# EAGLE board MPGUINO (EAGLE 5.00)
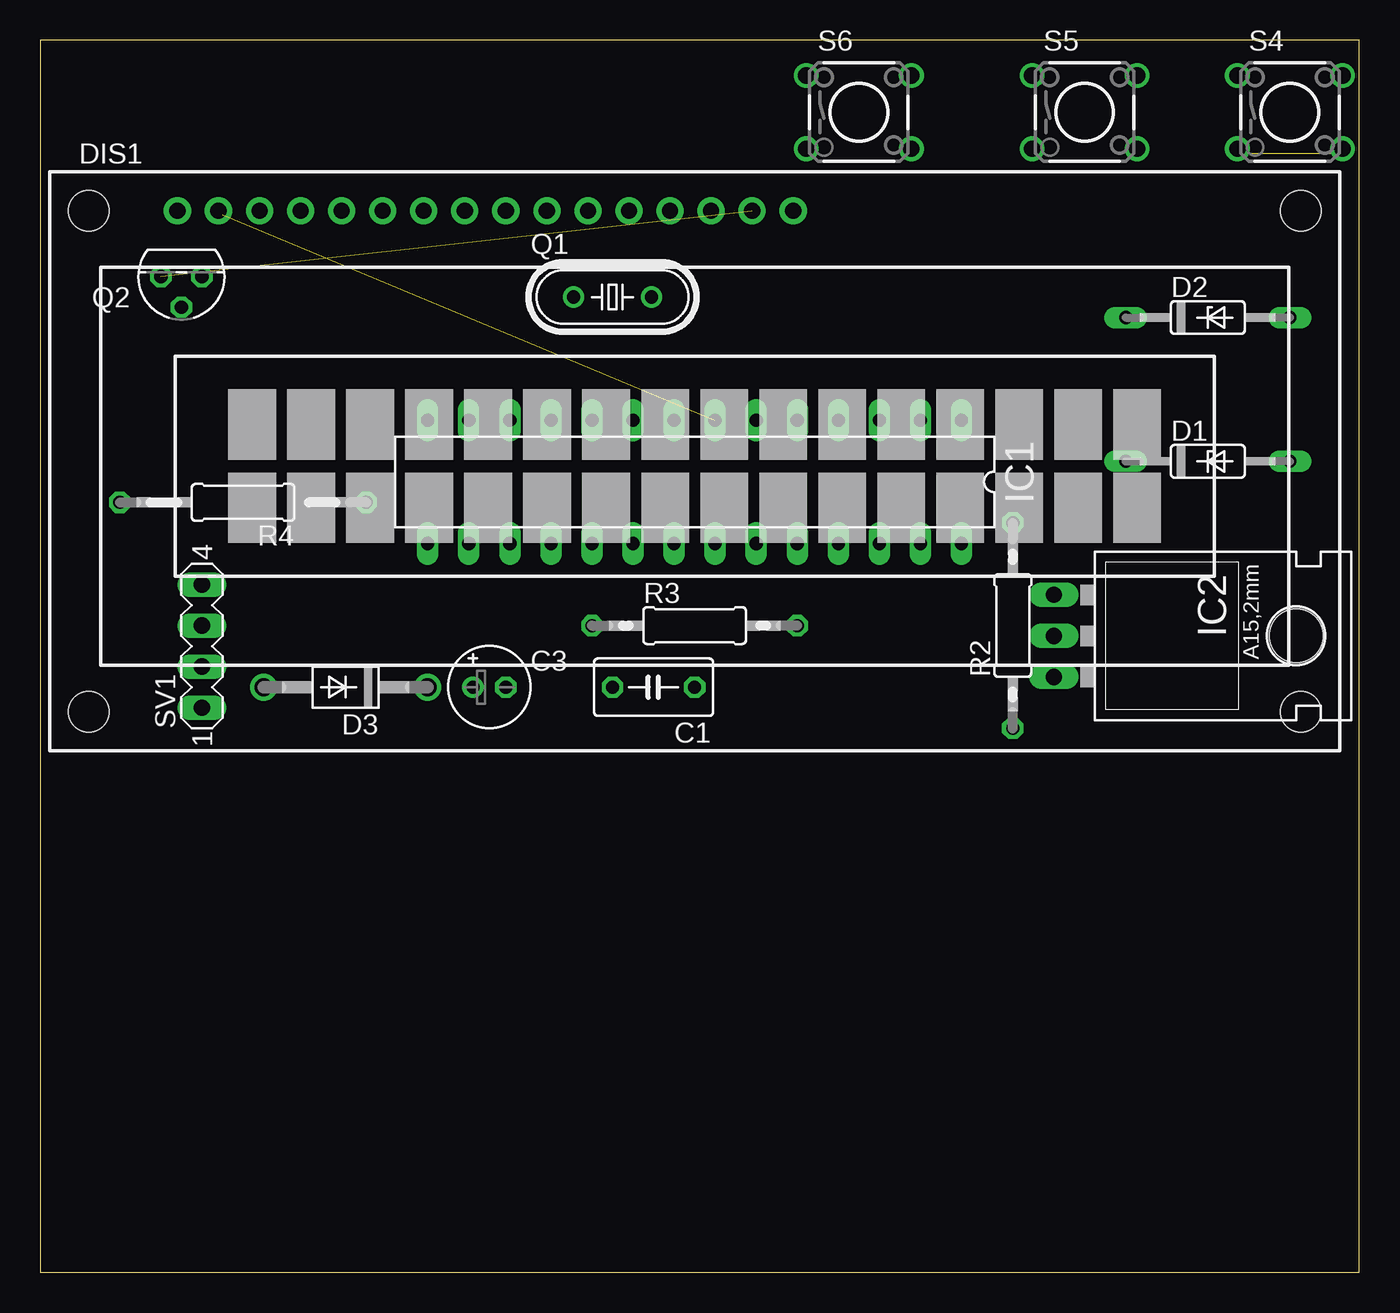
[diagram p0: board, top side]
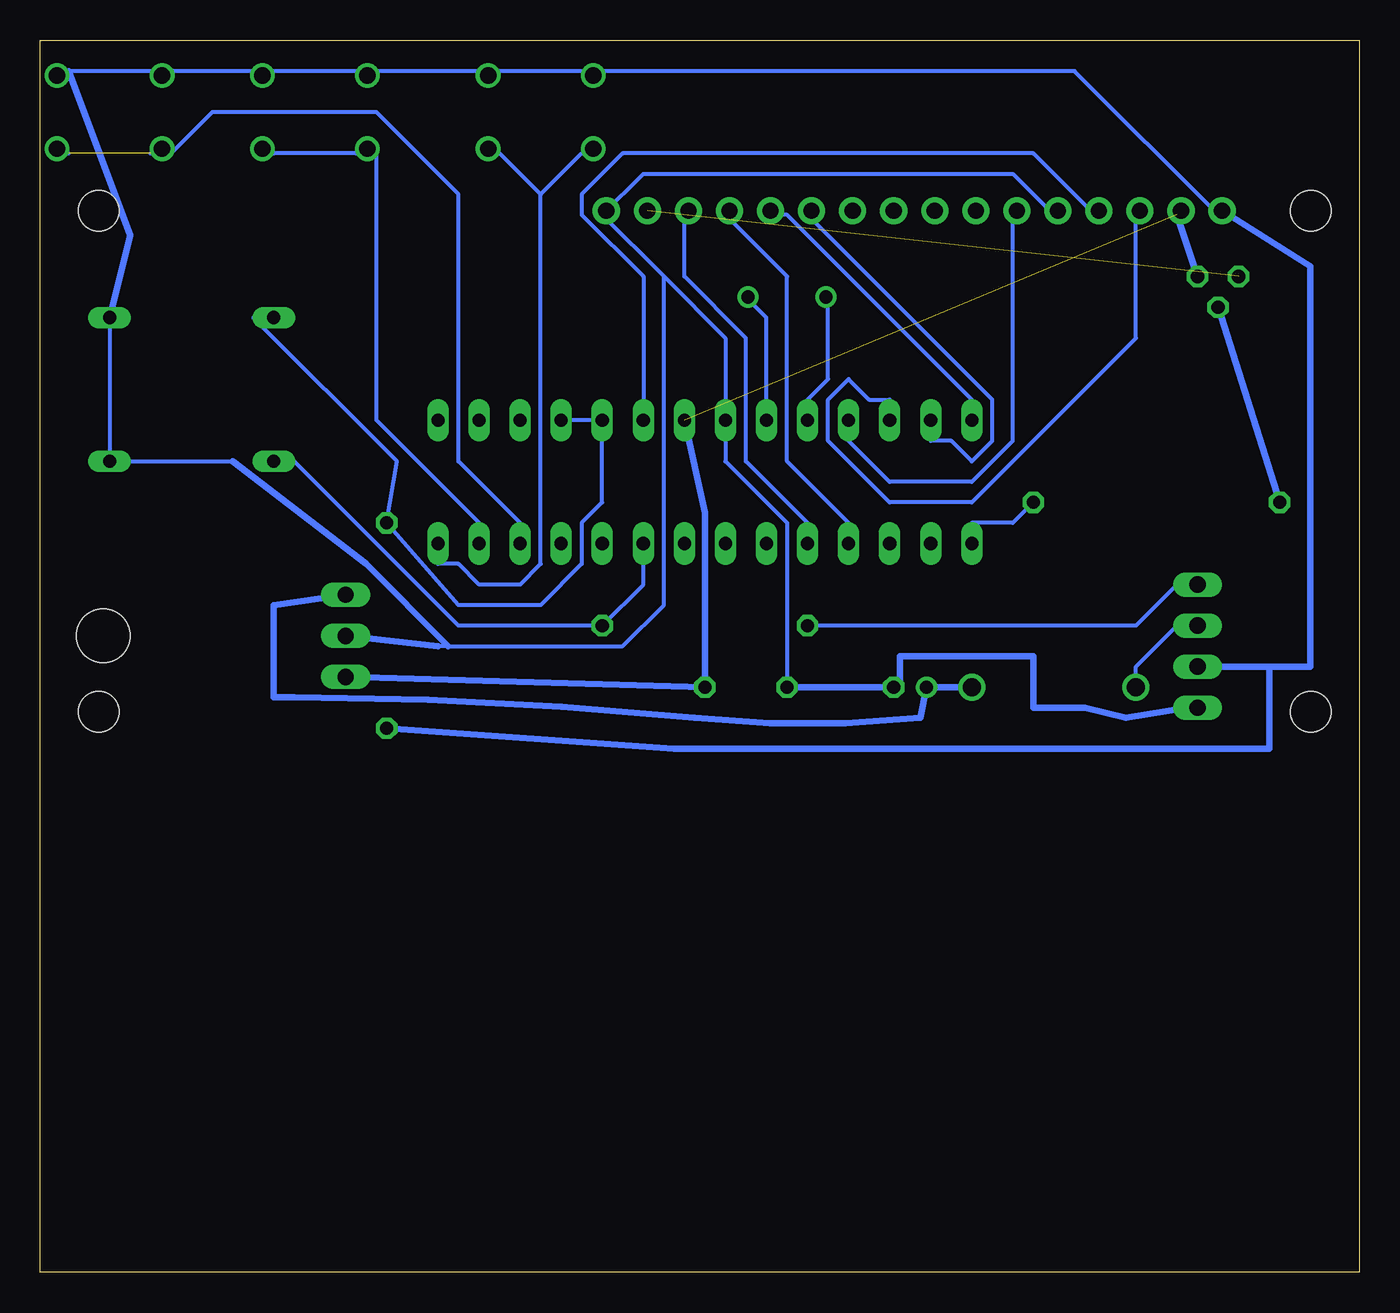
[diagram p1: board, bottom side, seen from below]

Size 81.58 x 76.19 mm. Coordinates in mm from the lower left corner, seen from the top.
Outline: 0,0 81.58,0 81.58,76.19 0,76.19 0,0
Copper layers (1*16): Top 0.035mm / dielectric 1.5mm / Bottom 0.035mm
Design rules "default": minimum track width 10mil, minimum drill 24mil, track to track 8mil, track to pad 8mil, pad to pad 8mil, via to via 8mil, smd to smd 8mil, copper to edge 40mil, drill to drill 8mil, minimum pad ring 10mil, minimum via ring 8mil, stop-mask expansion 4mil, vias tented up to drill 0mil, thermal gap 10mil

## Footprints (pad centres in the part's own frame; a part is rotated, then mirrored left to right if it is on the bottom)
C050-035X075 = drill 0.813 octagon: 1 -2.54,0; 2 2.54,0
E2-5 = drill 0.813 pad 1.27 round: + -1.016,0 | drill 0.813 pad 1.27 octagon: - 1.016,0
DO35Z10 = drill 0.813 long: A 5.08,0; C -5.08,0
DO41-10 = drill 1.118 round: A 5.08,0; C -5.08,0
TUXGR_16X2_R2 = drill 1 pad 1.676 round: 1 -32,15.5; 2 -29.46,15.5; 3 -26.92,15.5; 4 -24.38,15.5; 5 -21.84,15.5; 6 -19.3,15.5; 7 -16.76,15.5; 8 -14.22,15.5; 9 -11.68,15.5; 10 -9.14,15.5; 11 -6.6,15.5; 12 -4.06,15.5; 13 -1.52,15.5; 14 1.02,15.5; 15 3.56,15.5; 16 6.1,15.5 | hole 2.5: -37.5,-15.5; 37.5,-15.5; -37.5,15.5; 37.5,15.5
DIL28-3 = drill 0.813 long: 1 -16.51,-3.81; 2 -13.97,-3.81; 3 -11.43,-3.81; 4 -8.89,-3.81; 5 -6.35,-3.81; 6 -3.81,-3.81; 7 -1.27,-3.81; 8 1.27,-3.81; 9 3.81,-3.81; 10 6.35,-3.81; 11 8.89,-3.81; 12 11.43,-3.81; 13 13.97,-3.81; 14 16.51,-3.81; 15 16.51,3.81; 16 13.97,3.81; 17 11.43,3.81; 18 8.89,3.81; 19 6.35,3.81; 20 3.81,3.81; 21 1.27,3.81; 22 -1.27,3.81; 23 -3.81,3.81; 24 -6.35,3.81; 25 -8.89,3.81; 26 -11.43,3.81; 27 -13.97,3.81; 28 -16.51,3.81
78XXL = drill 1.016 long: GND 0,-3.81; IN -2.54,-3.81; OUT 2.54,-3.81 | hole 3.302: 0,11.176
HC49/S = drill 0.813 round: 1 -2.413,0; 2 2.413,0
TO92 = drill 0.813 octagon: 1 1.27,0; 2 0,1.905; 3 -1.27,0
0207/12 = drill 0.813 octagon: 1 -6.35,0; 2 6.35,0
0207/15 = drill 0.813 octagon: 1 -7.62,0; 2 7.62,0
TACTILE-PTH = drill 1.016 round: 1 -3.251,2.261; 2 3.251,2.261; 3 -3.251,-2.261; 4 3.251,-2.261
MA04-1 = drill 1.016 long: 1 -3.81,0; 2 -1.27,0; 3 1.27,0; 4 3.81,0

## Placement (x,y rotation side)
C1  .1uf  [C050-035X075]  37.94,36.19 180 top
C3  330uf  [E2-5]  27.78,36.19 0 top
D1  ZTK  [DO35Z10]  72.22,50.16 0 top
D2  ZTK  [DO35Z10]  72.22,59.05 0 top
D3  1N4004  [DO41-10]  18.89,36.19 180 top
DIS1  TUXGR_16X2_R2  [TUXGR_16X2_R2]  40.47,50.16 0 top
IC1  MEGA8-P  [DIL28-3]  40.47,48.89 180 top
IC2  5VReg  [78XXL]  66.51,39.37 270 top
Q1  16M  [HC49/S]  35.39,60.32 0 top
Q2  2N3906  [TO92]  8.73,61.59 180 top
R2  100K  [0207/12]  60.16,40 90 top
R3  100K  [0207/12]  40.47,40 0 top
R4  220  [0207/15]  12.54,47.62 180 top
S4  [TACTILE-PTH]  77.3,71.75 0 top
S5  [TACTILE-PTH]  64.61,71.75 0 top
S6  [TACTILE-PTH]  50.64,71.75 0 top
SV1  [MA04-1]  10,38.73 90 top

## Library data of the parts
C1 C3 R2-R4 = rcl
D1-D3 = diode
DIS1 = display-lcd
IC1 = atmel
IC2 = v-reg
Q1 = crystal
Q2 = transistor-pnp
S4-S6 = SparkFun
SV1 = con-lstb

## Nets
+5V: C1.1 DIS1.2 IC1.7 IC2.OUT Q2.3
AGND: IC1.22
AVCC: IC1.20
GND: C1.2 C3.- D1.A D2.A DIS1.1 DIS1.5 DIS1.16 IC1.8 IC2.GND R2.1 S4.1 S4.2 S5.1 S5.2 S6.1 S6.2 SV1.1 SV1.2
N$1: DIS1.4 IC1.6
N$2: DIS1.6 IC1.11
N$3: DIS1.3 IC1.12
N$4: DIS1.11 IC1.13
N$5: DIS1.12 IC1.14
N$6: DIS1.13 IC1.18
N$7: DIS1.14 IC1.19
N$8: C3.+ D3.C IC2.IN
N$9: DIS1.15 Q2.1
N$10: IC1.9 Q1.2
N$11: IC1.10 Q1.1
N$12: R3.1 SV1.4
N$14: D1.C IC1.23 R3.2
N$15: IC1.27 S5.3 S5.4
N$16: Q2.2 R4.2
N$17: IC1.15 R4.1
N$18: DIS1.7
N$19: IC1.26 S4.3 S4.4
N$20: IC1.28 S6.3 S6.4
N$21: D3.A SV1.3
N$22: D2.C IC1.4 IC1.5 R2.2
N$23: DIS1.8
N$24: DIS1.9
N$25: DIS1.10

## Tracks (layer width: path | path; a pad name or v marks a point on that pad's centre or on a via)
+5V  (1 unrouted)
  Bottom 0.254: DIS1.2 11.27,65.4
  Bottom 0.406: IC2.OUT C1.1 40.47,46.98 IC1.7 | 11.27,65.4 Q2.3
GND
  Bottom 0.254: S4.2 79.84,74.29 74.77,74.29 S4.1 73.49,74.29 68.41,74.29 S5.2 67.14,74.29 62.06,74.29 S5.1 60.8,74.29 54.44,74.29 S6.2 53.17,74.29 48.09,74.29 S6.1 46.83,74.29 17.62,74.29 8.73,65.4 DIS1.1 | D2.A D1.A 69.69,50.16 | 43.02,61.59 46.83,65.4 | 43.02,61.59 39.2,57.78 IC1.8 39.2,50.16 35.39,46.35 C1.2 | 56.98,38.73 56.35,38.73 45.56,38.73 43.02,41.27 43.02,61.59 | 46.83,65.4 44.28,67.94 21.43,67.94 18.89,65.4 DIS1.5 | 46.83,65.4 DIS1.16 | SV1.1 8.73,34.92
  Bottom 0.406: 79.84,74.29 76.03,64.13 D2.A | SV1.1 10.63,34.92 14.44,34.29 16.98,34.92 20.16,34.92 20.16,38.1 28.41,38.1 28.41,36.19 29.04,36.19 | 29.04,36.19 C3.- | C1.2 29.04,36.19 | R2.1 42.38,32.38 5.55,32.38 5.55,37.46 9.36,37.46 | 9.36,37.46 SV1.2 | DIS1.1 3.01,62.23 3.01,37.46 9.36,37.46 | 69.69,50.16 61.43,43.81 56.35,38.73 | IC2.GND 56.98,38.73
N$1
  Bottom 0.254: IC1.6 44.28,61.59 48.09,65.4 48.09,66.67 45.56,69.21 20.16,69.21 16.35,65.4 DIS1.4
N$2
  Bottom 0.254: IC1.11 31.58,51.43 29.04,48.89 23.96,48.89 21.43,51.43 21.43,65.4 DIS1.6
N$3
  Bottom 0.254: IC1.12 29.04,53.97 30.32,53.97 31.58,55.24 32.86,53.97 32.86,51.43 29.04,47.62 23.96,47.62 13.8,57.78 13.8,65.4 DIS1.3
N$4
  Bottom 0.254: IC1.13 26.5,51.43 25.24,51.43 23.96,50.16 22.7,51.43 22.7,53.97 34.12,65.4 DIS1.11
N$5
  Bottom 0.254: IC1.14 23.96,53.97 35.39,65.4 36.67,65.4 DIS1.12
N$6
  Bottom 0.254: IC1.18 31.58,46.35 35.39,50.16 35.39,61.59 39.2,65.4 DIS1.13
N$7
  Bottom 0.254: IC1.19 34.12,46.35 37.94,50.16 37.94,57.78 41.75,61.59 41.75,65.4 DIS1.14
N$8
  Bottom 0.406: IC2.IN 67.14,41.27 67.14,35.55 65.88,35.55 arc6 41.11,34.29 arc-12 27.14,34.29 C3.+ D3.C
N$9  (1 unrouted)
N$10
  Bottom 0.254: IC1.9 36.67,59.05 37.94,60.32 Q1.2
N$11
  Bottom 0.254: Q1.1 32.86,60.32 32.86,55.24 34.12,53.97 IC1.10
N$12
  Bottom 0.254: R3.1 13.8,40 11.27,42.54 SV1.4
N$14
  Bottom 0.254: IC1.23 44.28,42.54 R3.2 55.72,40 65.88,50.16 D1.C
N$15
  Bottom 0.254: IC1.27 54.44,46.35 60.8,52.7 60.8,69.21 S5.3 62.06,69.21 67.14,69.21 S5.4
N$16
  Bottom 0.406: Q2.2 R4.2
N$17
  Bottom 0.254: R4.1 21.43,46.35 23.96,46.35 IC1.15
N$19  (1 unrouted)
  Bottom 0.254: IC1.26 51.91,46.35 55.72,50.16 55.72,66.67 60.8,71.75 70.95,71.75 73.49,69.21 S4.3 74.77,69.21 | 79.84,69.21 S4.4
N$20
  Bottom 0.254: 50.64,66.67 50.64,43.81 51.91,42.54 54.44,42.54 55.72,43.81 56.98,43.81 IC1.28 | 50.64,66.67 48.09,69.21 S6.3 | 50.64,66.67 53.17,69.21 S6.4
N$21
  Bottom 0.254: D3.A 13.8,37.46 11.27,40 SV1.3
N$22
  Bottom 0.254: IC1.4 IC1.5 46.83,47.62 48.09,46.35 48.09,43.81 50.64,41.27 55.72,41.27 R2.2 59.52,50.16 68.41,59.05 D2.C